# EAGLE board Encoder Board PCB (EAGLE 9.7.0)
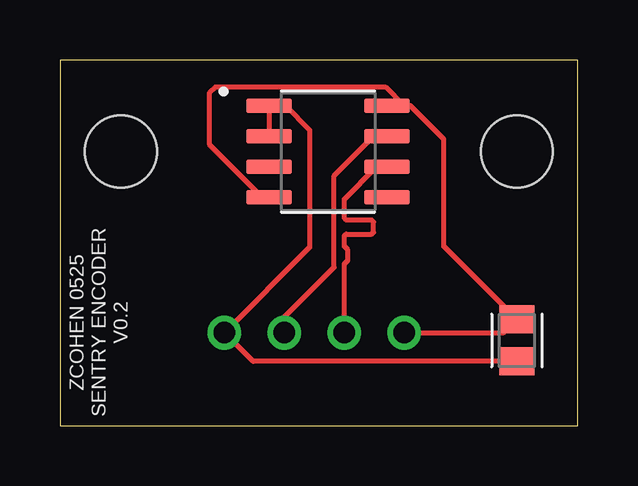
[diagram p0: board, top side]
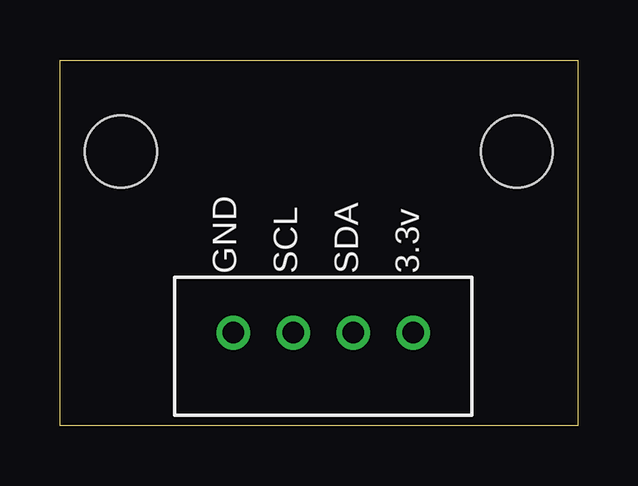
[diagram p1: board, bottom side, seen from below]

Size 21.59 x 15.24 mm. Coordinates in mm from the lower left corner, seen from the top.
Outline: 0,0 21.59,0 21.59,15.24 0,15.24 0,0
Copper layers (1*16): Top / Bottom
Stack-up Default Layer Stack: Top User Defined 0.035mm / Dielectric-1 User Defined 1.5mm / Bottom User Defined 0.035mm
Design rules: minimum copper width 6mil, minimum drill size 0.35mm, copper clearance wire_polygon to wire_polygon 6mil, copper clearance wire_polygon to pad_smd 6mil, copper clearance wire_polygon to via 6mil, copper clearance pad_smd to pad_smd 6mil, copper clearance pad_smd to via 6mil, copper clearance via to via 6mil, copper clearance smd to pad (same net) 6mil, copper clearance smd to via (same net) 6mil, copper clearance smd to smd (same net) 6mil, dimension clearance 40mil, via restrict clearance 0mil, restrict clearance 0mil, drill distance 6mil, keepout clearance 0mil
Holes 3 mm at 2.54,11.43 19.05,11.43

## Footprints (pad centres in the part's own frame; a part is rotated, then mirrored left to right if it is on the bottom)
CAPC2012X110 = smd 1.165 x 1.465: 1 -0.875,0; 2 0.875,0
B4B-XH-A = drill 0.9: 1 0,0; 2 2.5,0; 3 5,0; 4 7.5,0
AS5600 = smd 1.9 x 0.6: 1 -2.455,1.905; 2 -2.455,0.635; 3 -2.455,-0.635; 4 -2.455,-1.905; 5 2.455,-1.905; 6 2.455,-0.635; 7 2.455,0.635; 8 2.455,1.905

## Placement (x,y rotation side)
C2  100nF  [CAPC2012X110]  19.05,3.56 90 top
J1  B4B-XH-A  [B4B-XH-A]  6.86,3.88 180 bottom
U$1  AS5600  [AS5600]  11.18,11.43 0 top

## Library data of the parts
C2 = Capacitor; CATEGORY: Capacitor; PACKAGE_SIZE: 0805; PACKAGE_TYPE: SMD; SUBCATEGORY: Ceramic Capacitors; TYPE: MLCC
J1 = Connector; CATEGORY: Connectors; DATASHEET: https://www.jst-mfg.com/product/pdf/eng/eXH.pdf; DESCRIPTION: Connector Header Through Hole 4 position 0.098" (2.50mm); MANUFACTURER: JST Sales America Inc.; MPN: B4B-XH-A; OPERATING_TEMPERATURE: -25°C ~ 85°C; PACKAGE_SIZE: NA; PACKAGE_TYPE: Through Hole; PART_STATUS: Active; PITCH: 0.098" (2.50mm); ROHS: Compliant; SERIES: XH; SUBCATEGORY: Rectangular Connectors; TYPE: Male Headers
U$1 = CohenLibrary

## Nets
+3.3V: C2.1 J1.1 U$1.1 U$1.2
GND: C2.2 J1.4 U$1.4 U$1.8
I2C_N: J1.3 U$1.6
I2C_P: J1.2 U$1.7

## Tracks (layer width: path | path; a pad name or v marks a point on that pad's centre or on a via)
+3.3V
  Top 0.203: C2.1 8.06,2.68 J1.1 10.41,7.43 10.41,12.32 9.4,13.34 U$1.1 U$1.2
GND
  Top 0.203: 14.35,13.34 14.61,13.34 16,11.94 16,8.89 16,7.48 C2.2 18.5,3.88 J1.4 | 14.35,13.34 U$1.8 | U$1.4 8.43,9.53 6.25,11.7 6.25,13.89 6.48,14.12 13.56,14.12 14.35,13.34
I2C_N
  Top 0.203: J1.3 11.86,6.74 12.01,6.89 12.01,7.33 11.86,7.48 11.86,7.91 11.93,7.99 13,7.99 13.07,8.06 13.07,8.49 13,8.57 11.93,8.57 11.86,8.65 11.86,9.45 13.21,10.79 U$1.6
I2C_P
  Top 0.203: J1.2 9.36,4.53 11.43,6.6 11.43,10.41 13.08,12.06 U$1.7

## Text on the board
SilkscreenTop: ZCOHEN 0525 / SENTRY ENCODER / V0.2
SilkscreenBottom: 3.3v | SDA | SCL | GND